# Allegro board ir_board-mp-0902am1030.brd
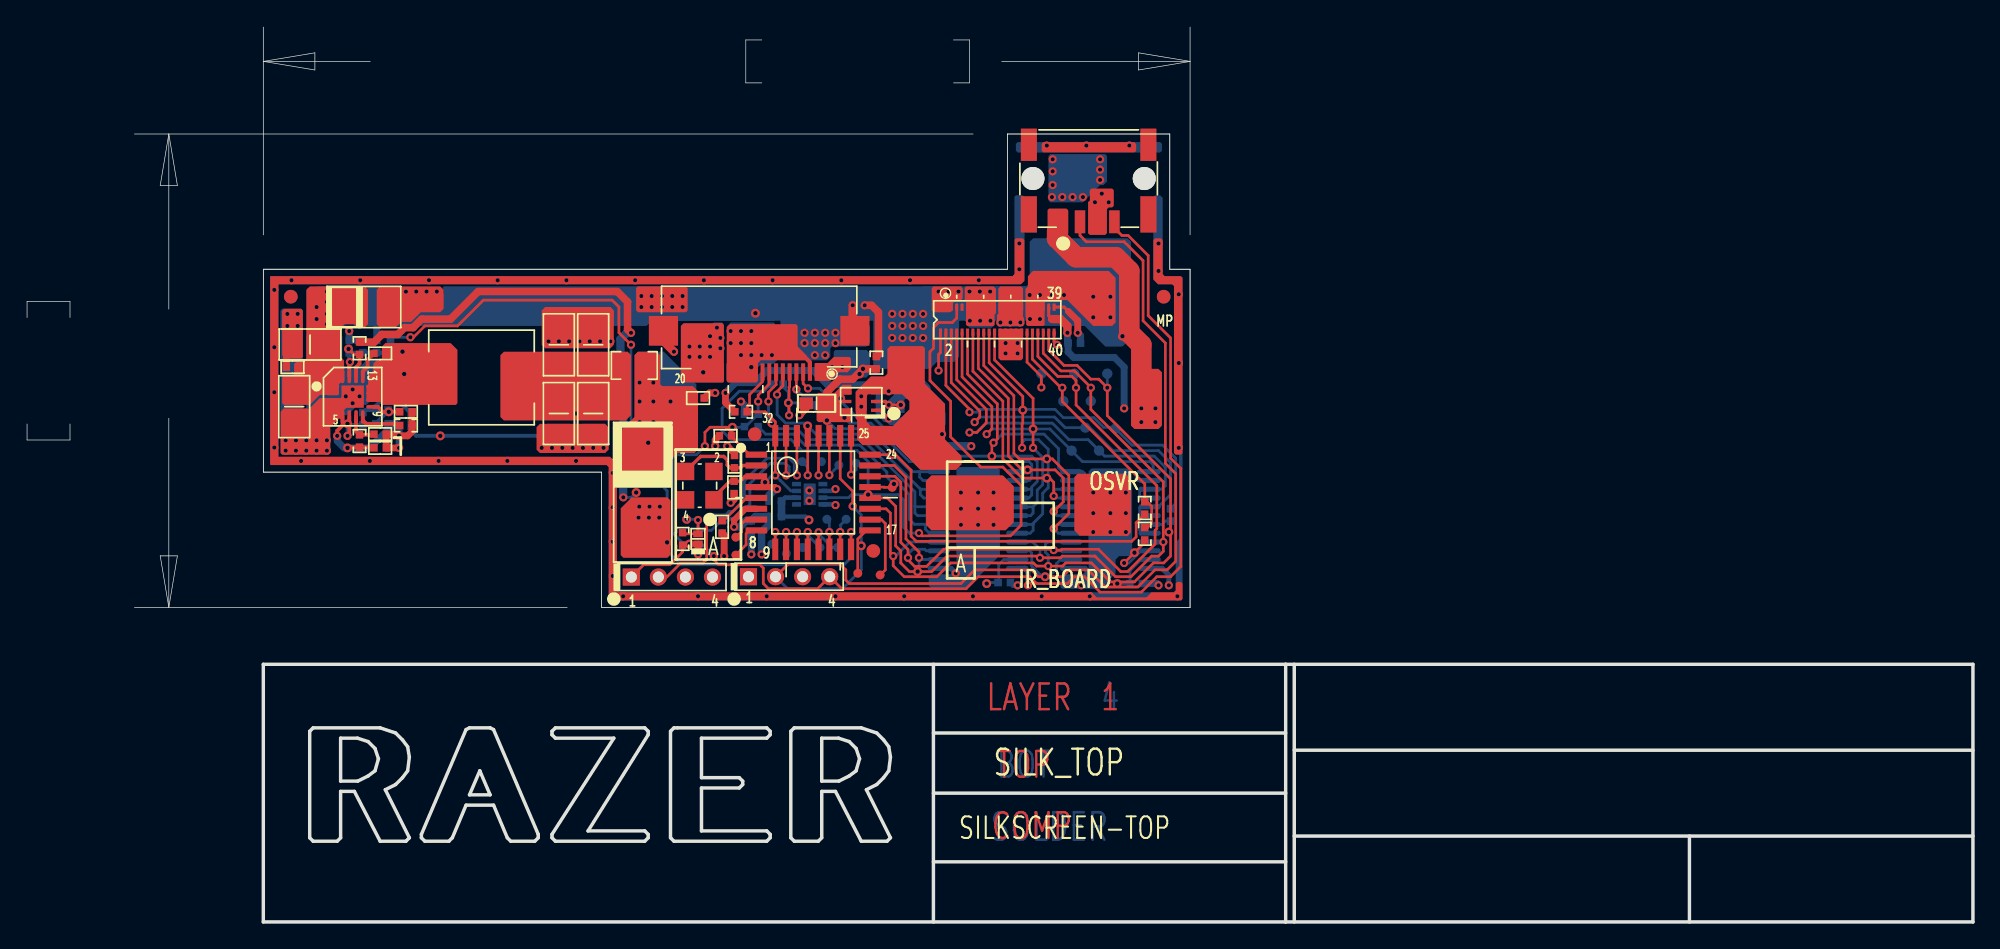
[diagram p0: board, top side]
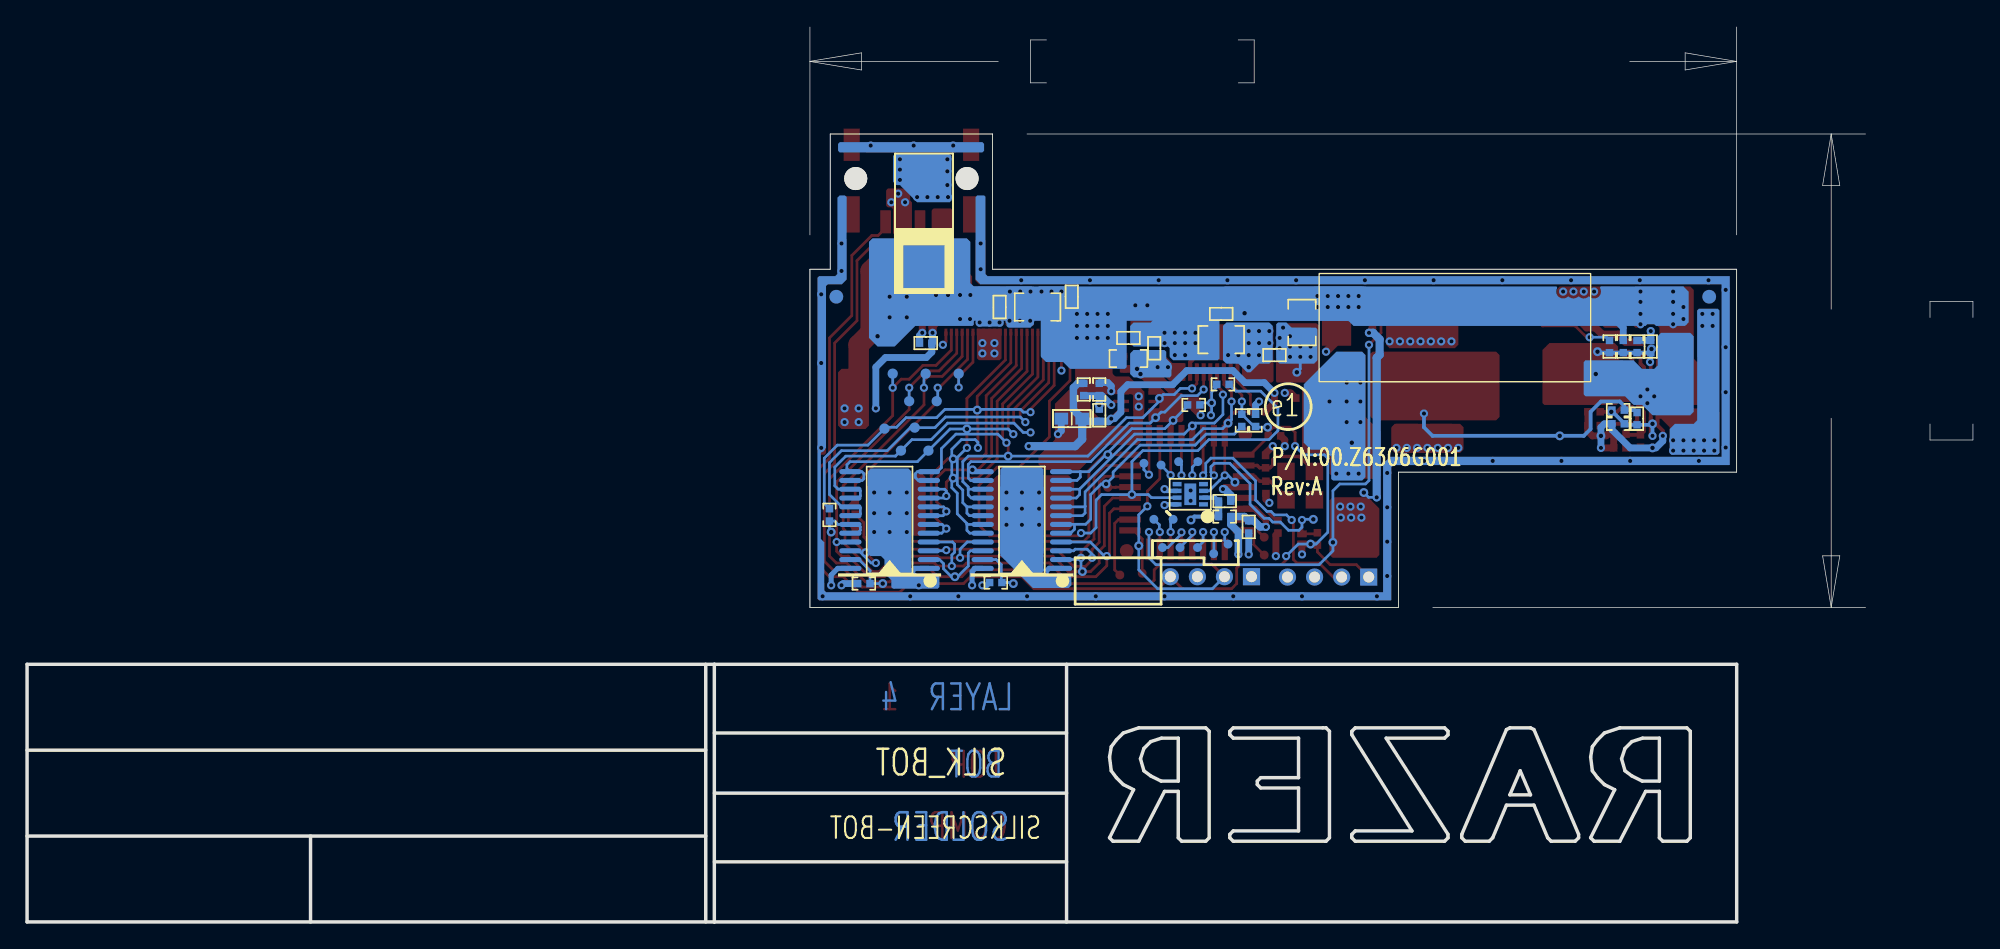
[diagram p1: board, bottom side, seen from below]

Outline 143.83 x 66.17 mm; copper layers: TOP, GND, VCC, BOTTOM. Coordinates in mm from the lower left corner of the outline.
Outline path: 17.46,48.26 17.46,33.26 ; 17.46,48.26 72.46,48.26 ; 17.46,48.26 17.46,33.26 ; 17.46,48.26 72.46,48.26 ; 17.46,33.26 42.46,33.26 ; 17.46,33.26 42.46,33.26 ; 72.46,48.26 72.46,58.26 ; 72.46,48.26 72.46,58.26 ; 42.46,33.26 42.46,23.26 ; 42.46,33.26 42.46,23.26 ; 42.46,23.26 85.96,23.26 ; 42.46,23.26 85.96,23.26 ; 85.96,23.26 85.96,48.26 ; 85.96,23.26 85.96,48.26 ; 72.46,58.26 84.46,58.26 ; 72.46,58.26 84.46,58.26 ; 84.46,58.26 84.46,48.26 ; 84.46,58.26 84.46,48.26 ; 84.46,48.26 85.96,48.26 ; 84.46,48.26 85.96,48.26

## Placement (name value [footprint] x y rotation side)
C1  0.1uF  [C0402]  51.63 41.91 0 bottom
C2  6TPE220MAZB  [TANB]  25.08 45.47 0 top
C3  0.1uF  [C0402]  55.56 44.96 0 bottom
C4  0.1uF  [C0402]  66.61 46.23 90 bottom
C5  0.1uF  [C0402]  71.95 45.47 270 bottom
C6  4TPE470ML  [TAND]  77.53 51.82 90 bottom
C7  0.1uF  [C0402]  62.42 43.18 180 bottom
C8  0.1uF  [C0402]  60.52 42.42 90 bottom
C9  0.1uF  [C0402]  77.41 42.8 0 bottom
C10  NC_47uF  [C1206]  19.75 38.1 270 top
C11  47uF  [C1206]  20.92 42.7 180 top
C12  0.1uF  [C0402]  19.62 41.02 180 top
C13  390pF  [C0402]  24.83 37.21 270 bottom
C14  0.1uF/25V  [C0402]  26.1 42.04 180 top
C15  47uF  [C1206]  39.31 42.67 90 top
C16  47uF  [C1206]  41.85 42.67 90 top
C17  0.1uF  [C0402]  49.59 38.73 0 top
C18  0.1uF  [C0402]  23.81 42.55 270 bottom
C19  15nF  [C0402]  28 37.72 0 top
C20  2.7nF  [C0402]  26.1 35.05 0 top
C21  47uF  [C1206]  39.31 37.59 270 top
C22  47uF  [C1206]  41.85 37.59 270 top
C23  56pF  [C0402]  26.1 36.07 0 top
C24  0.1uF  [C0402]  64.58 37.46 90 bottom
C25  10uF  [C0603]  66.61 37.21 0 bottom
C26  10uF  [C0603]  58.36 38.35 180 top
C27  0.1uF  [C0402]  53.53 29.21 270 bottom
C28  NC_33pF  [C0402]  52.29 34.04 90 top
C29  4.7uF  [C0402]  51.37 29.21 270 top
C30  NC_33pF_NC  [C0402]  52.26 32.13 270 top
C31  0.1uF  [C0402]  51.63 35.94 0 top
C32  4.7uF  [C0402]  55.31 31.11 180 bottom
C33  4TPE470ML  [TAND]  45.5 31.6 270 top
D1  CDBQR0230L  [COMCHIP_CDBQR0230L-HF]  49.59 28.32 90 top
FFC  FFC  [TPC30T]  21.03 49.92 0 top
L1  2.2 uH  [VISHAY_IHLP-2525CZ-01]  33.59 40.26 180 top
NOREF  -  []  72.46 58.26 0 top
NOREF#2  -  []  17.46 48.26 0 top
NOREF#3  -  [unnamed#2]  84.01 46.23 0 top
NOREF#4  -  []  87.46 48.26 90 top
NOREF#5  -  []  17.46 0 0 top
NOREF#6  -  []  42.46 23.26 90 top
NOREF#7  -  []  84.46 48.26 0 top
NOREF#8  -  [unnamed#2]  19.49 46.23 0 top
NOREF#9  -  [unnamed#2]  19.49 46.23 180 bottom
NOREF#10  -  [unnamed#2]  84.01 46.23 180 bottom
P1  ACES_50502-20_20PIN_FPC  [ACES_50502-20]  54.11 40.66 180 top
P2  JAE-WP7B-P040VA1  [JAE_WP7B-PXXXVA1]  71.71 44.53 0 top
P3  NO install  [JP4-2MM]  56.32 25.53 0 top
P4  NO install  [JP4-2MM]  47.66 25.5 0 top
P5  -  [ERNI_214012]  78.46 54.97 180 top
PCB  PCB  [TPC30T]  23.14 49.92 0 top
R1  0  [R0805]  49.59 44.31 270 bottom
R2  0  [R0805]  55.55 43.05 180 bottom
R3  0  [R0805]  69.15 45.47 0 bottom
R4  0  [R0603]  62.42 41.66 180 bottom
R5  36.5K  [R0402]  26.23 37.85 180 bottom
R6  10K_NC  [R0402]  25.84 42.55 270 bottom
R7  10K  [R0402]  26.86 42.55 270 bottom
R8  0  [R0805]  44.89 41.15 0 top
R9  10K  [R0402]  24.83 42.55 270 bottom
R10  78.7K  [R0402]  28 36.7 0 top
R11  10K  [R0402]  26.23 36.83 180 bottom
R12  10K  [R0402]  24.57 42.42 270 top
R13  20.5K  [R0402]  24.57 35.56 270 top
R14  0  [R0402]  62.78 41.35 270 top
R16  52.3K  [R0402]  65.72 39.37 270 bottom
R17  30.1K  [R0402]  64.58 39.37 270 bottom
R19  0  [R0402]  84.52 30.1 90 bottom
R20  0  [R0402]  82.61 28.7 270 top
R21  330  [R0402]  72.22 25.1 180 bottom
R22  330  [R0402]  81.98 25.02 180 bottom
R23  NI  [R0402]  82.61 30.61 270 top
R24  4.99K  [R0402]  52.77 37.72 0 top
R25  120  [R0402]  48.45 28.32 90 top
R26  75  [R0402]  55.31 29.97 180 bottom
R27  0_NC  [R0402]  54.04 37.08 270 bottom
R28  0  [R0402]  53.02 37.08 90 bottom
R29  0_NC  [R0402]  57.59 38.23 0 bottom
R30  0  [R0402]  55.44 39.75 180 bottom
TP1  TP_1mm  [TPC30T#2]  79.84 40.54 180 bottom
TP2  TP_1mm  [TPC30T#2]  78.63 38.51 180 bottom
TP3  TP_1mm  [TPC30T#2]  77.41 40.54 180 bottom
TP4  TP_1mm  [TPC30T#2]  76.59 38.51 180 bottom
TP5  TP_1mm  [TPC30T#2]  74.97 40.54 180 bottom
TP6  TP_1mm  [TPC30T#2]  80.45 36.47 180 bottom
TP7  TP_1mm  [TPC30T#2]  78.22 36.55 180 bottom
TP8  TP_1mm  [TPC30T#2]  79.24 34.85 180 bottom
TP9  TP_1mm  [TPC30T#2]  77.2 34.85 180 bottom
TP10  TP_1mm  [TPC26T]  63.06 25.65 0 top
TP11  TP_1mm  [TPC26T]  63.94 32.13 0 top
TP12  TP_1mm  [TPC26T]  60.54 29.77 180 bottom
TP13  TP_1mm  [TPC26T]  59.12 29.77 180 bottom
TP14  TP_1mm  [TPC26T]  59.91 27.69 180 bottom
TP15  TP_1mm  [TPC26T]  58.61 27.69 180 bottom
TP16  TP_1mm  [TPC26T]  57.32 27.69 180 bottom
TP17  TP_1mm  [TPC26T]  56.12 27.23 180 bottom
TP18  TP_1mm  [TPC26T]  55.05 27.94 180 bottom
TP19  TP_1mm  [TPC26T]  52.39 27.13 0 top
TP20  TP_1mm  [TPC26T]  52.39 28.45 0 top
TP21  TP_1mm  [TPC26T]  61.4 25.78 0 top
TP22  TP_1mm  [TPC26T]  61.28 33.91 180 bottom
TP23  TP_1mm  [TPC26T]  60.01 33.78 180 bottom
TP24  TP_1mm  [TPC26T]  58.71 34.04 180 bottom
TP25  TP_1mm  [TPC26T]  57.29 34.04 180 bottom
U1  TPS54478RTET  [S-PWQFN-N16]  24.07 38.84 270 top
U2  TPS7A3701DRVT  [S-PWSON-N6]  61.66 38.48 90 top
U4  STP16CPC26XTR  [TSSOP24-G]  70.29 29.72 90 bottom
U5  STP16CPC26XTR  [TSSOP24-G]  80.07 29.72 90 bottom
U6  STM8S003K3T6CTR  [LQFP32-0_8MM]  58.1 31.75 270 top
U7  VSOP58438  [VSOP8-G]  57.85 31.62 90 bottom
Y1  NC_TXC_7V_16MHz  [TXC_7V]  49.72 32.26 90 top

## Library data of the parts
C1 C3-C5 C7-C9 C12 C14 C17 C18 C24 C27 C31 = CAP_6
C2 C6 C33 = C_D_KO CAP 150U M 6_0.3V
C10 C11 C15 C16 C21 C22 C25 C26 = CAP_0
C13 C19 C30 = CAP NP
C20 C23 = CAP_NP
C28 = CAP NP_0
C29 C32 = CAPCC 0402_1
D1 = DIODE ZENER_0
FFC PCB TP1-TP25 = T POINT R
L1 = INDUCTOR
P1 = CON2_3
P2 = CON34_0
P3 P4 = 53261-0371_3
P5 = 53261-0371_4
R1-R14 R16 R17 R19-R30 = R_RP_3
U1 = TPS54218RTER
U2 = TPS7A37_1
U4 U5 = STP16CPC26XTR_4
U6 = STM8S003K3T6CTR_1
U7 = VSOP5843_0
Y1 = CRYSTAL_1

## Footprints (pads in the part's own frame, mm; a bottom-side part is the same pattern mirrored in y, then rotated)
ACES_50502-20
  rect 0.305x1.295 smd: 1(-4.75,0) 2(-4.25,0) 3(-3.75,0) 4(-3.25,0) 5(-2.75,0) 6(-2.25,0) 7(-1.75,0) 8(-1.25,0) 9(-0.75,0) 10(-0.25,0) 11(0.25,0) 12(0.75,0) 13(1.25,0) 14(1.75,0) 15(2.25,0) 16(2.75,0) 17(3.25,0) 18(3.75,0) 19(4.25,0) 20(4.75,0)
  rect 2.159x2.21 smd: S1(-7.075,-3.05) S2(7.075,-3.05)
C0402
  rect 0.559x0.559 smd: 1(-0.457,0) 2(0.457,0)
C0603
  rect 1.016x0.889 smd: 1(-0.775,0) 2(0.775,0)
C1206
  rect 1.27x1.651 smd: 1(-1.397,0) 2(1.397,0)
COMCHIP_CDBQR0230L-HF
  rect 0.508x0.711 smd: A(0.375,0) C(-0.375,0)
ERNI_214012
  round 1.702 hole 1.702 unplated: (-4.115,0) (4.115,0)
  rect 0.787x1.702 smd: 1(1.905,3.2) 2(0.635,3.2) 3(-0.635,3.2) 4(-1.905,3.2)
  rect 1.194x2.692 smd: S1(-4.415,2.65) S2(4.415,2.65)
  rect 1.194x2.388 smd: S3(-4.415,-2.5) S4(4.415,-2.5)
JAE_WP7B-PXXXVA1
  rect 0.229x0.533 smd: 1(-3.8,0.925) 2(-3.8,-0.925) 3(-3.4,0.925) 4(-3.4,-0.925) 5(-3,0.925) 6(-3,-0.925) 7(-2.6,0.925) 8(-2.6,-0.925) 9(-2.2,0.925) 10(-2.2,-0.925) 11(-1.8,0.925) 12(-1.8,-0.925) 13(-1.4,0.925) 14(-1.4,-0.925) 15(-1,0.925) 16(-1,-0.925) 17(-0.6,0.925) 18(-0.6,-0.925) 19(-0.2,0.925) 20(-0.2,-0.925) 21(0.2,0.925) 22(0.2,-0.925) 23(0.6,0.925) 24(0.6,-0.925) 25(1,0.925) 26(1,-0.925) 27(1.4,0.925) 28(1.4,-0.925) 29(1.8,0.925) 30(1.8,-0.925) 31(2.2,0.925) 32(2.2,-0.925) 33(2.6,0.925) 34(2.6,-0.925) 35(3,0.925) 36(3,-0.925) 37(3.4,0.925) 38(3.4,-0.925) 39(3.8,0.925) 40(3.8,-0.925) S1(-4.2,0.925) S2(-4.2,-0.925) S3(4.2,0.925) S4(4.2,-0.925)
JP4-2MM
  rect 1.27x1.27 hole 0.813: 1(-3,0)
  round 1.27 hole 0.813: 2(-1,0) 3(1,0) 4(3,0)
LQFP32-0_8MM
  rect 0.457x1.6 smd: 1(-2.8,-4.2) 2(-2,-4.2) 3(-1.2,-4.2) 4(-0.4,-4.2) 5(0.4,-4.2) 6(1.2,-4.2) 7(2,-4.2) 8(2.8,-4.2) 17(2.8,4.2) 18(2,4.2) 19(1.2,4.2) 20(0.4,4.2) 21(-0.4,4.2) 22(-1.2,4.2) 23(-2,4.2) 24(-2.8,4.2)
  rect 1.6x0.457 smd: 9(4.2,-2.8) 10(4.2,-2) 11(4.2,-1.2) 12(4.2,-0.4) 13(4.2,0.4) 14(4.2,1.2) 15(4.2,2) 16(4.2,2.8) 25(-4.2,2.8) 26(-4.2,2) 27(-4.2,1.2) 28(-4.2,0.4) 29(-4.2,-0.4) 30(-4.2,-1.2) 31(-4.2,-2) 32(-4.2,-2.8)
  round 1.016 smd: S1(4.318,4.445) S2(-4.318,-4.318)
R0402
  rect 0.559x0.559 smd: 1(-0.457,0) 2(0.457,0)
R0603
  rect 1.016x0.889 smd: 1(-0.775,0) 2(0.775,0)
R0805
  rect 1.143x1.397 smd: 1(-0.953,0) 2(0.953,0)
S-PWQFN-N16
  oval 0.279x1.016 smd: 1(-0.75,-1.5) 2(-0.25,-1.5) 3(0.25,-1.5) 4(0.75,-1.5) 9(0.75,1.5) 10(0.25,1.5) 11(-0.25,1.5) 12(-0.75,1.5)
  oval 1.016x0.279 smd: 5(1.5,-0.75) 6(1.5,-0.25) 7(1.5,0.25) 8(1.5,0.75) 13(-1.5,0.75) 14(-1.5,0.25) 15(-1.5,-0.25) 16(-1.5,-0.75)
  rect 1.651x1.651 smd: 17(0,0)
S-PWSON-N6
  rect 0.254x0.66 smd: 1(-0.65,-1.05) 2(0,-1.05) 3(0.65,-1.05) 4(0.65,1.05) 5(0,1.05) 6(-0.65,1.05)
  rect 1.397x0.813 smd: 7(0,0)
TANB
  rect 1.27x2.54 smd: 1(-1.651,0) 2(1.651,0)
TAND
  rect 2.337x2.667 smd: 1(-3.391,0) 2(3.391,0)
TPC26T
  round 0.66 smd: 1(0,0)
TPC30T
  round 0 smd: 1(0,0)
TPC30T#2
  round 0.762 smd: 1(0,0)
TSSOP24-G
  oval 0.381x1.651 smd: 1(-3.575,-2.9) 2(-2.925,-2.9) 3(-2.275,-2.9) 4(-1.625,-2.9) 5(-0.975,-2.9) 6(-0.325,-2.9) 7(0.325,-2.9) 8(0.975,-2.9) 9(1.625,-2.9) 10(2.275,-2.9) 11(2.925,-2.9) 12(3.575,-2.9) 13(3.575,2.9) 14(2.925,2.9) 15(2.275,2.9) 16(1.625,2.9) 17(0.975,2.9) 18(0.325,2.9) 19(-0.325,2.9) 20(-0.975,2.9) 21(-1.625,2.9) 22(-2.275,2.9) 23(-2.925,2.9) 24(-3.575,2.9)
  rect 4.978x3.2 smd: 25(0,0)
TXC_7V
  rect 1.295x1.295 smd: 1(-1.05,-1.05) 2(1.05,-1.05) 3(1.05,1.05) 4(-1.05,1.05)
unnamed#2
  round 1.016 smd: 1(0,0)
VISHAY_IHLP-2525CZ-01
  rect 2.489x3.505 smd: 1(-3.1,0) 2(3.1,0)
VSOP8-G
  rect 0.33x0.66 smd: 1(-0.75,-0.975) 2(-0.25,-0.975) 3(0.25,-0.975) 4(0.75,-0.975) 5(0.75,0.975) 6(0.25,0.975) 7(-0.25,0.975) 8(-0.75,0.975)
  rect 1.6x0.889 smd: 9(0,0)

## Nets
2V8: C4.1 C7.1 C17.1 C33.1 R3.1(L) R4.1(L) R8.2(R)
2V8_HMD: C8.1 P1.1 P1.2 R4.2(R)
2V8_PG: R12.2(R) U1.14(PWRGD)
2V8IN: C5.1 C6.1 P2.9 P2.11 P2.13 P2.15 P2.17 P2.19 P2.31 P2.33 P2.35 P2.37 R3.2(R)
AGND: C2.2 C3.2 C4.2 C5.2 C6.2 C7.2 C8.2 C9.2 C10.2 C11.2 C12.2 C15.2 C16.2 C17.2 C18.1 C19.2 C20.2 C21.2 C22.2 C23.2 C25.2 C26.2 C27.2 C28.2 C29.2 C30.2 C31.1 C32.2 C33.2 P1.S1 P1.S2 P2.1 P2.3 P2.21 P2.22 P2.23 P2.24 P2.25 P2.26 P2.27 P2.28 P2.29 P2.30 P2.S1 P2.S2 P2.S3 P2.S4 P3.3 P4.3 P5.3 R2.1(L) R9.1(L) R10.2(R) R11.1(L) R17.1(L) R21.1(L) R22.1(L) R28.2(R) U1.3(GND0) U1.4(GND1) U1.5(AGND0) U1.17(POWER_PAD) U2.3(GND) U2.7(EP) U4.1(GND) U4.25(THM_G) U5.1(GND) U5.25(THM_G) U6.4(V SS) U7.6(GND1) U7.8(GND2) U7.9(EP)
GND_IN: C1.2 P1.3 P1.11 P1.12 P1.13 P1.14 P1.15 R2.2(R)
VCC_5V: C2.1 C3.1 C10.1 C11.1 C12.1 R1.1(L) R6.1(L) R14.1(L) U1.1(VIN1) U1.2(VIN2) U1.16(VIN0)
VCC_5VIN: C1.1 P1.16 P1.17 P1.18 P1.19 P1.20 R1.2(R)
3D3: C9.1 C24.1 C25.1 C27.1 D1.C(CATHODE) P2.39 P3.1 P5.1 R12.1(L) R16.1(L) R24.1(L) R26.2(R) U2.1(OUT) U4.24(VDD) U5.24(VDD) U6.6(VDD)
DATA0: U4.2(SDI) U6.23(PC6 (HS)/SPI_MOSI)
DATA1: R23.2(R) U6.24(PC7 (HS)/SPI_MISO)
DD_BST: C14.2 U1.13(BOOT)
DD_COM1: C20.1 R13.2(R)
DD_COMP: C23.1 R13.1(L) U1.7(COMP)
DD_EN: C18.2 R6.2(R) R7.2(R) R9.2(R) U1.15(EN)
DD_OUT: C13.1 C15.1 C16.1 C21.1 C22.1 L1.1 R5.2(R) R8.1(L)
DD_RT: R10.1(L) U1.8(RT/CLK)
DD_SS: C19.1 U1.9(SS)
DD_SW: C14.1 L1.2 U1.10(PH0) U1.11(PH1) U1.12(PH2)
DD_VSNS: C13.2 R5.1(L) R11.2(R) U1.6(VSENSE)
DRVCLK: P2.36 TP3.1(TP) U4.3(CLK) U5.3(CLK) U6.22(PC5 (HS)/SPI_SCK)
EC_OSCIN: C28.1 U6.2(OSCIN/PA1) Y1.3
EC_OSCOUT: C30.1 U6.3(OSCOUT/PA2) Y1.1
EC_VCAP: C29.1 U6.5(VCAP)
IR_LED_IN: P2.5 R30.2(R) U7.7(IN)
LATEN: P2.40 TP1.1(TP) U4.4(LE) U5.4(LE) U6.19(PC2 (HS) /TIM1_CH2)
LDO_FBA: C24.2 R16.2(R) R17.2(R) U2.2(FB)
LDO_INA: C26.1 R14.2(R) U2.4(EN) U2.6(IN)
LED1: R27.2(R) U4.5(OD0) U4.6(OD1)
LED1_IN: P1.9 R27.1(L) R28.1(L)
LED2: P1.8 U4.7(OD2) U4.8(OD3)
LED3: P1.7 U4.9(OD4) U4.10(OD5)
LED4: R29.2(R) U4.11(OD6) U4.12(OD7)
LED5: P1.5 U4.13(OD8) U4.14(OD9)
LED6: P1.4 U4.15(OD10) U4.16(OD11)
LED7: P2.20 U4.17(OD12) U4.18(OD13)
LED8: P2.18 U4.19(OD14) U4.20(OD15)
LED9: P2.16 U5.5(OD0) U5.6(OD1)
LED10: P2.14 U5.7(OD2) U5.8(OD3)
LED11: P2.12 U5.9(OD4) U5.10(OD5)
LED12: P2.10 U5.11(OD6) U5.12(OD7)
LED13: P2.8 TP9.1(TP) U5.13(OD8) U5.14(OD9)
LED14: P2.6 TP8.1(TP) U5.15(OD10) U5.16(OD11)
LED15: P2.4 TP7.1(TP) U5.17(OD12) U5.18(OD13)
LED16: P2.2 R19.2(R) TP6.1(TP)
LED16_1: R19.1(L) U5.19(OD14) U5.20(OD15)
LED_PTD: P1.6 R29.1(L) R30.1(L)
LED_PWR_EN: R7.1(L) U6.16(TIM1_CH1N/AIN0/(HS) PB0)
OUTEN: P2.38 TP2.1(TP) U4.21(O\E\) U5.21(O\E\) U6.20(PC3 (HS) /TIM1_CH3)
REXTA: R21.2(R) U4.23(R-EXT)
REXTB: R22.2(R) U5.23(R-EXT)
SDI: P2.34 R20.1(L) R23.1(L) TP4.1(TP)
SDO1: U4.22(SDO) U5.2(SDI)
SDO2: R20.2(R) U5.22(SDO)
SDO_BACK: P2.32 TP5.1(TP)
SWIM_DATA: P3.2 P5.2 U6.26(PD1 (HS)/SWIM)
UART_RX: D1.A(ANODE) R25.2(R) U6.31(PD6 (HS)/UART1_RX)
UART_RX1: P4.1 R25.1(L)
UART_TX: P4.2 U6.30(PD5 (HS)/UART1_TX)
UPU_RES: C31.2 P3.4 P5.4 U6.1(NRST)
VERTICAL_SYNC: P1.10 R24.2(R) U6.32(PD7 (HS)/TLI [ TIM1_CH4]) U7.3(OUT)
VS: C32.1 R26.1(L) U7.2(VS)
N16006904: TP10.1(TP) U6.18(PC1 (HS) /TIM1_CH1/UART1_CK)
N16006928: TP11.1(TP) U6.21(PC4 (HS) /TIM1_CH4/CLK_CCO)
N16007072: TP12.1(TP) U6.15(TIM1_CH2N/ AIN1/(HS) PB1)
N16007076: TP13.1(TP) U6.14(TIM1_CH3N/ AIN2/ (HS) PB2)
N16007080: TP14.1(TP) U6.13(TIM1_ETR/AIN3/(HS) PB3)
N16007084: TP15.1(TP) U6.12(I2C_SCL/(T) PB4)
N16007088: TP16.1(TP) U6.11(I2C_SDA/ (T) PB5)
N16007096: TP17.1(TP) U6.10(PB6)
N16007100: TP18.1(TP) U6.9(PB7)
N16007406: TP21.1(TP) U6.17(PE5 (HS) /SPI_NSS)
N16007454: TP19.1(TP) U6.8(PF4)
N16007512: TP20.1(TP) U6.7([SPI_NSS] TIM2_CH3/(HS)PA3)
N16007570: TP22.1(TP) U6.25(PD0 (HS)/ TIM1_BKIN [CLK_CCO)
N16007642: TP23.1(TP) U6.27(PD2 (HS) [TIM2_CH3])
N16007646: TP24.1(TP) U6.28(PD3 (HS)/TIM2_CH2/ADC_ETR)
N16007650: TP25.1(TP) U6.29(PD4 (HS)/BEEP/TIM2_CH1)

Pads without a net: FFC 1; NOREF#3 1; NOREF#8 1; NOREF#9 1; NOREF#10 1; P2 7; P4 4; P5 S1 S2 S3 S4; PCB 1; U2 5; U6 S1 S2; U7 1 4 5; Y1 2 4

## Via types
v1: diameter 0.61, hole 0.305, TOP to BOTTOM, 318 vias
v2: diameter 0.66, hole 0.33, TOP to BOTTOM, 45 vias

## Routing (per net, layer and track width the routed paths; a pad name or vN(x,y) marks a point on that pad's centre or on a via; arc(x,y) is an arc through that point)
2V8:
  vias: v1(45.28,39.88) v1(45.28,38.48) v1(45.28,36.96) v1(45.4,33.15) v1(46.16,33.15) v1(46.29,39.88) v1(46.29,38.48) v1(46.29,36.96) v1(47.05,33.15) v1(47.56,38.48) v1(63.94,44.96) v1(63.94,44.07) v1(63.94,43.18) v1(64.71,44.96) v1(64.71,44.07) v1(64.71,43.18) v1(65.47,44.96) v1(65.47,44.07) v1(65.47,43.18) v1(66.23,44.96) v1(66.23,44.07) v1(66.23,43.18) v2(45.91,35.43)
2V8_HMD:
  vias: v1(59.5,41.02) v1(60.26,41.02) v2(61.53,40.51)
2V8_PG: length 2.7
  TOP w0.203: v2(23.76,42.37) 24.17,41.96 R12.2
  TOP w0.279: U1.14 24.32,41.02 24.57,41.27 R12.2
2V8IN:
  vias: v1(69.66,46.61) v1(69.68,44.45) v1(70.42,46.61) v1(70.45,44.45) v1(71.18,46.61) v1(71.21,44.45) v1(74.1,46.35) v1(74.13,44.58) v1(74.87,46.35) v1(74.87,44.58) v1(75.76,46.35) v1(76.64,46.35) v1(78.8,46.23) v1(78.8,44.7) v1(80.07,46.23) v1(80.07,44.7) v2(80.96,43.31)
AGND: length 51
  TOP w0.203: v1(67.37,40.77) 67.37,41.96 67.51,42.1 P2.S2
  TOP w0.229: v1(76.14,42.67) 75.91,42.9 P2.S4 ; 76.96,45.15 76.66,45.46 P2.S3
  TOP w0.279: U1.5 23.32,36.71 22.92,36.32 v1(22.92,35.94)
  TOP w0.457: v1(55.44,32) 55.29,32.15 U6.4
  TOP w0.508: C12.2 19.16,42.34 C11.2 ; v1(52.01,30.99) 52.26,31.24 C30.2 ; C29.2 51.52,28.6 v1(51.52,27.05) ; C26.2 57.58,37.96 v1(57.09,37.46) ; v1(50.86,39.12) 50.43,39.12 C17.2 ; C19.2 R10.2 28.46,36.27 28.13,35.94 27.11,35.94 26.99,36.07 C23.2 C20.2 v1(27.5,35.05) ; v1(51.75,35.18) 52.29,34.65 C28.2 ; C31.1 50.86,35.64 v1(50.86,35.18) ; v1(77.66,43.56) 77.66,44.45 76.96,45.15
  TOP w0.61: v1(47.82,42.16) 47.04,42.94 P1.S2 ; v1(61.02,45.59) 61.02,43.87 P1.S1
  BOTTOM w0.33: U7.8 59.7,30.87 v1(59.75,30.82) ; v1(59.75,32) 59.62,31.87 U7.6
  BOTTOM w0.381: R21.1 72.89,24.89 v1(73.22,24.89) ; 78.42,25.91 78.19,26.14 U5.1 ; U4.1 68.28,26.14 v1(68.64,25.78)
  BOTTOM w0.508: R22.1 83.5,25.02 v1(83.63,24.89) ; C25.2 67.39,36.31 v1(67.63,36.07) ; v1(53.53,27.18) C27.2 ; v1(23.81,43.69) C18.1 R9.1 ; v1(27.5,35.05) v2(27.5,35.94) 27.5,36.58 27.24,36.83 R11.1 26.68,36.4 25.34,35.05 23.43,35.05 22.92,35.56 v1(22.92,35.94) ; v1(63.69,39.24) 63.69,39.62 63.94,39.88 64.53,39.88 R17.1 ; C9.2 77.86,43.36 v1(77.66,43.56) ; v1(52.77,38.48) 53.02,38.23 R28.2
  BOTTOM w0.559: v1(55.44,32) 55.31,32 54.85,31.55 C32.2
  vias: v1(18.28,46.74) v1(18.28,42.49) v1(18.28,39.17) v1(18.28,35.08) v1(19.11,35.61) v1(19.11,34.85) v1(19.24,44.96) v1(19.24,44.07) v1(19.55,47.45) v1(19.88,35.61) v1(19.88,34.85) v1(20,44.96) v1(20,44.07) v1(20.26,34.09) v1(20.64,35.61) v1(20.64,34.85) v1(21.4,35.61) v1(21.4,34.85) v1(22.16,35.61) v1(22.16,34.85) v1(23.56,38.86) v1(24.07,39.37) v1(24.07,38.35) v1(24.57,38.86) v1(24.63,47.45) v1(25.34,34.09) v1(28,46.61) v1(28.77,46.61) v1(29.53,46.61) v1(29.71,47.45) v1(30.29,46.61) v1(30.42,34.09) v1(34.79,47.45) v1(35.5,34.09) v1(38.04,35.05) v1(38.54,42.93) v1(38.8,35.05) v1(39.31,42.93) v1(39.56,35.05) v1(39.87,47.45) v1(40.07,42.93) v1(40.32,35.05) v1(40.58,34.09) v1(40.83,42.93) v1(41.08,35.05) v1(41.59,42.93) v1(41.85,35.05) v1(42.35,42.93) v1(42.61,35.05) v1(43.12,42.93) v1(43.29,33.2) v1(43.29,30.66) v1(43.29,28.12) v1(43.29,25.58) v1(44.06,24.08) v1(44.95,47.45) v1(45.2,29.9) v1(45.25,30.71) v1(46.01,30.71) v1(45.96,29.9) v1(46.77,30.71) v1(46.72,29.9) v1(49.59,24.08) v1(50.03,47.45) v1(54.67,24.08) v1(55.11,47.45) v1(57.47,43.56) v1(57.47,42.8) v1(57.82,31.9) v1(57.82,31.14) v1(58.23,43.56) v1(58.23,42.8) v1(58.23,41.91) v1(58.99,43.56) v1(58.99,42.8) v1(58.99,41.91) v1(59.75,43.56) v1(59.75,42.8) v1(59.75,24.08) v1(60.19,47.45) v1(61.66,38.86) v1(61.66,38.1) v1(64.83,24.08) v1(65.27,47.45) v1(67.37,46.61) v1(68.11,46.61) v1(68.85,46.61) v1(69.02,31.75) v1(69.02,30.56) v1(69.02,29.36) v1(69.91,24.08) v1(70.29,31.75) v1(70.29,30.56) v1(70.29,29.36) v1(70.35,47.45) v1(71.44,31.75) v1(71.44,30.56) v1(71.44,29.36) v1(71.95,44.32) v1(72.33,42.8) v1(72.33,42.04) v1(72.68,44.32) v1(73.22,42.8) v1(73.22,42.04) v1(73.34,50.16) v1(73.34,48.26) v1(73.42,44.32) v1(74.99,24.08) v1(75.37,57.4) v1(75.81,56.39) v1(75.81,55.5) v1(75.81,54.48) v1(75.76,53.59) v1(76.52,53.59) v1(77.28,53.59) v1(77.91,24.89) v1(78.04,53.59) v1(78.3,57.4) v1(78.55,24.08) v1(78.8,31.75) v1(78.8,30.23) v1(78.8,28.83) v1(78.93,53.21) v1(79.31,56.39) v1(79.31,55.63) v1(79.31,54.86) v1(79.44,53.85) v1(79.95,53.21) v1(80.07,31.75) v1(80.07,30.23) v1(80.07,28.83) v1(81.22,31.75) v1(81.22,30.23) v1(81.22,28.83) v1(81.47,57.4) v1(83.63,50.16) v1(83.63,48.13) v1(85.03,24.08) v1(85.13,46.41) v1(85.13,41.33) v1(85.13,35.05)
GND_IN: length 3.8
  TOP w0.305: P1.3 57.86,41.39 56.71,42.55 55.31,42.55
  vias: v1(52.01,43.69) v1(52.01,42.8) v1(52.77,43.69) v1(52.77,42.8) v1(52.77,41.91) v1(53.53,43.69) v1(53.53,42.8) v1(53.53,41.91) v1(54.29,41.91) v1(55.05,41.91) v2(53.53,41.02)
VCC_5V: length 6.2
  TOP w0.559: R14.1 62.93,41.96 62.93,45.09 62.42,45.59 v1(61.91,45.59)
  BOTTOM w0.508: 26.35,44.45 25.84,43.94 R6.1
  vias: v1(21.4,45.47) v1(21.4,44.58) v1(22.16,46.61) v1(22.16,45.85) v1(22.16,44.96) v1(22.16,44.2) v1(24.57,46.61) v1(24.57,45.85) v1(24.57,44.96) v1(24.57,44.2) v1(45.4,46.28) v1(45.4,45.47) v1(46.16,46.28) v1(46.16,45.47) v1(46.93,46.28) v1(46.93,45.47) v1(47.69,46.28) v1(47.69,45.47) v1(48.45,46.28) v1(48.45,45.47) v2(53.84,45.01)
VCC_5VIN: length 1.2
  BOTTOM w0.203: v1(49.72,41.78) 49.72,40.89 v2(49.97,40.64)
  vias: v1(48.96,42.55) v1(48.96,41.78) v1(49.72,42.55) v1(50.48,43.31) v1(50.48,42.55) v1(50.48,41.78) v1(50.99,43.94) v1(51.24,43.18) v1(51.24,42.42)
3D3: length 108.2
  TOP w0.229: P2.39 75.51,44.82 75.76,44.58
  TOP w0.254: U2.1 63.07,37.83 v1(63.69,37.21)
  TOP w0.457: U6.6 53.09,30.55 52.26,29.72 v1(52.26,29.21)
  TOP w0.508: R24.1 51.63,38.4 v1(51.63,39.12) ; D1.C v1(49.59,27.18)
  TOP w0.559: R12.1 25.67,42.88 26.23,43.43 26.23,43.44 27.4,43.44 27.9,43.94 28.54,43.94 29.17,44.58 31.31,44.58 33.34,46.61 43.62,46.61 44.39,45.85 44.39,43.82 v1(44.64,43.56)
  TOP w0.61: 75.76,44.58 76.39,44.58 76.9,44.07 v1(76.9,43.56)
  TOP w1.524: 76.14,51.05 76.14,50.55 77.53,49.15 80.45,49.15 81.47,48.13 81.47,43.56 82.36,42.67 82.36,40.51 82.74,40.13
  BOTTOM w0.203: v2(45.02,31.75) 44.67,31.39 v1(44.07,31.39)
  BOTTOM w0.381: v1(73.98,24.89) 73.98,25.91 73.74,26.14 U4.24 ; v1(84.39,24.89) 84.39,25.65 83.9,26.14 U5.24
  BOTTOM w0.508: v1(63.69,37.21) 63.46,37.21 62.98,37.69 62.98,39.22 62.47,39.73 59.14,39.73 58.1,40.77 54.7,40.77 53.81,39.88 52.39,39.88 v1(51.63,39.12) ; v1(76.9,43.56) 76.9,42.85 C9.1 76.95,42.14 77.36,41.73 80.38,41.73 81.09,41.02 v1(81.09,37.97)
  BOTTOM w0.559: R16.1 66.15,39.83 66.48,39.5 66.48,37.86 C25.1 65.63,37.01 C24.1 63.89,37.01 v1(63.69,37.21) ; v1(52.26,29.21) 52.69,29.21 53.15,29.67 C27.1 53.84,29.97 R26.2 54.85,29.39 54.29,28.83 v1(54.29,27.18)
  BOTTOM w0.61: v1(44.64,43.56) 44.34,43.56 43.85,43.08 43.85,41.93 44.07,41.72 v1(44.07,31.39) ; v1(69.79,35.18) 66.36,35.18 65.84,35.7 C25.1
  vias: v1(82.36,37.97) v1(82.36,36.96) v1(83.4,37.97) v1(83.4,36.96)
DATA0: length 12
  TOP w0.203: v1(65.93,26.92) 65.93,27.36 64.96,28.32 64.96,32.89 64.1,33.75 U6.23
  BOTTOM w0.203: v2(65.82,25.91) 65.93,26.01 v1(65.93,26.92) 66,26.8 67.39,26.8 U4.2
DATA1: length 27.3
  TOP w0.203: U6.24 v2(63.94,34.55) 64.19,34.55 65.34,33.4 65.34,28.52 65.72,28.14 81.65,28.14 81.98,28.47 81.98,29.51 R23.2
DD_BST: length 2
  TOP w0.279: U1.13 24.82,40.71 25.17,41.06 25.17,41.57 C14.2
DD_COM1: length 2
  TOP w0.279: v2(23.69,35.05) 23.74,35.1 R13.2 25.59,35.1 C20.1
DD_COMP: length 2.5
  TOP w0.279: U1.7 24.32,36.28 R13.1 25.59,36.02 C23.1
DD_EN: length 5.8
  TOP w0.279: v1(23.87,41.4) 23.82,41.35 U1.15
  BOTTOM w0.305: v1(23.87,41.4) 23.81,41.45 C18.2 R9.2 R6.2 R7.2 27.67,42.09 v2(27.75,42.16)
DD_OUT: length 19.3
  BOTTOM w0.279: C13.1 25.01,37.85 R5.2 25.77,38.15 26.1,38.48 27.5,38.48 28.26,37.72 28.26,36.45 28.77,35.94 v2(30.54,35.94) 39.94,35.94 40.58,36.58 v1(40.58,37.59)
DD_RT: length 3.1
  TOP w0.279: R10.1 27.42,36.83 25.08,36.83 24.82,37.1 U1.8
DD_SS: length 2.1
  TOP w0.279: U1.9 25.93,38.09 26.3,37.72 v2(26.73,37.72) C19.1
DD_SW:
  vias: v2(27.88,40.51)
DD_VSNS: length 5.9
  TOP w0.279: U1.6 23.82,36.07 v1(23.69,35.94)
  BOTTOM w0.279: R5.1 26.68,37.77 25.77,36.86 R11.2 25.69,36.75 C13.2 23.76,36.75 v2(23.69,36.83) v1(23.69,35.94)
DRVCLK: length 54.1
  TOP w0.203: P2.36 74.71,41.81 76.19,40.34 77.23,40.34 77.53,40.03 v1(77.53,39.5) 77.53,38.23 83.5,32.26 83.5,29.08 83.38,28.96 83.38,27.94 81.34,25.91 80.84,25.91 79.18,27.56 76.48,27.56 76.42,27.5 v1(75.88,27.5) 75.82,27.56 67.75,27.56 66.48,26.29 65.6,26.29 65.11,26.77 v1(65.11,26.92) 65.11,27.53 64.58,28.07 64.58,32.51 64.14,32.95 U6.22
  BOTTOM w0.203: v1(75.88,27.5) 75.94,27.44 U5.3 ; TP3.1 77.53,40.41 v1(77.53,39.5) ; v1(65.11,26.92) 65.11,27.2 65.47,27.56 66.36,27.56 66.47,27.44 U4.3
EC_OSCIN: length 6.3
  TOP w0.254: U6.2 52.9,33.75 52.72,33.58 C28.1 51.96,33.58 51.75,33.78 51.75,34.16 51.5,34.42 49.78,34.42 Y1.3
EC_OSCOUT: length 4
  TOP w0.254: Y1.1 50.77,31.4 51.96,32.59 C30.1 52.72,32.59 53.08,32.95 U6.3
EC_VCAP: length 3.2
  TOP w0.203: U6.5 53.18,31.35 52.91,31.09 51.48,29.67 C29.1
IR_LED_IN: length 59
  TOP w0.203: P2.5 68.71,44.65 68.39,44.32 67.37,44.32 66.99,43.94 66.99,42.42 66.74,42.16 66.74,40.03 68.26,38.51 68.26,35.86 70.5,33.63 72.12,33.63 73.47,32.28 73.47,29.34 72.68,28.55 66.13,28.55 v1(65.93,28.75)
  BOTTOM w0.203: v2(62.17,31.6) 64.4,31.6 64.81,31.19 64.81,29.16 65.21,28.75 v1(65.93,28.75) ; v2(62.17,31.6) 62.17,34.04 61.35,34.85 57.29,34.85 56.48,35.66 52.03,35.66 51.37,36.32 51.37,37.97 52.64,39.24 54.47,39.24 R30.2 ; v2(62.17,31.6) 60.95,31.6 60.72,31.37 U7.7
LATEN: length 58.1
  TOP w0.203: P2.40 75.51,42.28 76.64,41.15 77.61,41.15 78.63,40.13 79.21,40.13 v1(79.84,39.5) 79.84,37.44 84.52,32.77 84.52,27.05 84.01,26.54 83.25,26.54 81.85,25.15 80.07,25.15 78.68,26.54 76.77,26.54 76.54,26.31 v1(75.48,26.31) 74.61,26.31 74.38,26.54 68.26,26.54 67.25,25.53 64.83,25.53 64.02,26.34 v1(64.02,27.05) 63.82,27.25 63.82,30.23 63.49,30.55 U6.19
  BOTTOM w0.203: v1(64.02,27.05) 64.2,27.05 65.24,28.09 U4.4 ; U5.4 75.43,28.09 75.27,27.94 75.27,27.33 75.48,27.13 v1(75.48,26.31) ; TP1.1 v1(79.84,39.5)
LDO_FBA: length 5.3
  TOP w0.203: v2(64.58,38.23) v1(63.69,38.23)
  TOP w0.254: U2.2 63.44,38.48 v1(63.69,38.23)
  BOTTOM w0.508: R17.2 64.38,38.91 v1(63.69,38.23) ; R17.2 C24.2 ; R17.2 R16.2
LDO_INA: length 5.2
  TOP w0.559: C26.1 59.13,39.18 60.08,40.13 61.02,40.13 v2(61.79,40.89) R14.2
LED1: length 19.1
  BOTTOM w0.203: 66.41,29.4 66.41,29.03 66.7,28.74 U4.5 ; 66.41,29.4 65.58,29.4 65.21,29.77 65.21,31.6 64.43,32.38 v2(64.07,32.38) 63.55,32.91 63.55,33.26 61.56,35.26 57.49,35.26 56.68,36.07 54.6,36.07 R27.2 ; 66.41,29.4 67.39,29.4 U4.6
LED1_IN: length 5.8
  TOP w0.203: P1.9 54.86,39.78 54.04,38.96 v1(54.04,38.48)
  BOTTOM w0.203: v1(54.04,38.48) R27.1 53.12,36.63 R28.1 52.97,36.58 v2(52.13,36.58)
LED2: length 22
  TOP w0.203: v1(54.8,38.48) 54.8,39.17 55.36,39.73 P1.8
  BOTTOM w0.203: 65.62,30.73 65.62,31.8 61.76,35.66 57.7,35.66 56.88,36.47 55.46,36.47 v2(55.05,36.88) 54.8,37.13 v1(54.8,38.48) ; 65.62,30.73 65.62,30.24 65.82,30.04 U4.7 ; 65.62,30.73 65.66,30.69 U4.8
LED3: length 19.4
  TOP w0.203: P1.7 55.86,39.65 55.44,39.22 v1(55.44,38.99)
  BOTTOM w0.203: 66.03,32 61.96,36.07 58.31,36.07 v2(57.7,36.68) 57.49,36.88 56.07,36.88 55.44,37.52 v1(55.44,38.99) ; 66.03,32 66.04,31.99 U4.10 ; 66.03,32 66.03,31.6 66.28,31.34 U4.9
LED4: length 13.4
  BOTTOM w0.203: U4.11 66.23,32.64 65.98,32.89 65.98,33.29 ; U4.12 65.98,33.29 ; 65.98,33.29 65.35,33.29 62.17,36.47 59.73,36.47 v2(59.12,37.08) 58.05,38.15 R29.2
LED5: length 24.2
  TOP w0.203: v1(56.86,39.37) P1.5
  BOTTOM w0.203: v1(56.86,39.37) 57.32,38.91 58.51,38.91 59.73,37.69 60.01,37.69 v2(60.41,37.29) 60.82,36.88 62.37,36.88 65.21,34.04 74.05,34.04 74.26,33.83 74.26,33.27 ; 74.26,33.27 74.24,33.29 U4.13 ; 74.26,33.27 74.26,32.82 74.08,32.64 U4.14
LED6: length 25.5
  TOP w0.203: P1.4 57.36,39.8 v1(57.72,39.45)
  BOTTOM w0.203: 74.26,32 74.26,31.57 74.03,31.34 U4.16 ; 74.26,32 74.25,31.99 U4.15 ; 74.26,32 74.26,32.16 74.66,32.56 74.66,34.04 74.26,34.44 65.42,34.44 62.57,37.29 61.35,37.29 60.13,38.51 v2(60.13,38.71) 59.85,38.99 59.04,38.99 58.59,39.45 v1(57.72,39.45)
LED7: length 17.6
  TOP w0.203: P2.20 71.51,41.56 74.36,38.71 v2(74.36,36.45) v1(74.36,35.05)
  BOTTOM w0.203: U4.17 74.36,30.69 ; 74.36,30.69 74.66,31 74.66,31.93 75.07,32.33 75.07,34.34 v1(74.36,35.05) ; 74.36,30.69 74.36,30.23 74.18,30.04 U4.18
LED8: length 21.2
  TOP w0.203: P2.18 71.11,41.35 73.6,38.86 v2(73.6,37.85) 73.6,36.88 73.55,36.83 v1(73.55,35.05)
  BOTTOM w0.203: 74.36,29.39 U4.19 ; 74.36,29.39 74.36,28.96 74.15,28.74 U4.20 ; 74.36,29.39 74.36,29.46 75.07,30.18 75.07,31.7 75.48,32.11 75.48,34.95 74.76,35.66 73.75,35.66 73.55,35.46 v1(73.55,35.05)
LED9: length 21.9
  TOP w0.203: v1(75.88,29.08) 77,30.2 77,33.02 75.78,34.24 v2(75.37,34.24) 73.34,34.24 72.94,34.65 72.94,38.91 70.71,41.14 P2.16
  BOTTOM w0.203: U5.5 76.22,28.74 v1(75.88,29.08) 76.19,29.39 U5.6
LED10: length 20.6
  TOP w0.203: P2.14 70.31,40.93 72.53,38.71 72.53,34.44 73.55,33.43 v2(73.95,33.43) 75.98,33.43 76.59,32.82 76.59,31.06 v1(75.88,30.35)
  BOTTOM w0.203: U5.8 76.09,30.69 75.88,30.48 v1(75.88,30.35) 75.88,30.28 76.12,30.04 77.17,30.04 U5.7
LED11: length 18.8
  TOP w0.203: v1(75.88,31.5) 75.88,32.51 75.58,32.82 v2(75.37,32.82) 73.55,32.82 72.12,34.24 72.12,38.51 69.91,40.72 P2.12
  BOTTOM w0.203: U5.9 76.04,31.34 v1(75.88,31.5) 75.88,31.87 76.01,31.99 U5.10
LED12: length 20.6
  TOP w0.203: P2.10 69.51,40.51 71.72,38.3 71.72,35.71 v1(71.44,35.43) 71.31,35.31 v2(71.31,34.44)
  BOTTOM w0.203: v1(71.44,35.43) 72.07,36.07 75.17,36.07 76.24,35 76.24,33.59 76.54,33.29 U5.12 78.02,33.29 78.17,33.15 78.17,32.86 77.95,32.64 U5.11
LED13: length 25.3
  TOP w0.203: v1(70.93,36.07) 71.31,36.45 71.31,38.1 69.11,40.3 P2.8
  BOTTOM w0.203: v1(70.93,36.07) 71.31,36.45 75.61,36.45 TP9.1 78.02,34.04 82.99,34.04 83.23,33.8 83.23,33.51 83.01,33.29 U5.13 82.12,33.29 81.98,33.15 81.98,32.77 82.1,32.64 U5.14
LED14: length 29.9
  TOP w0.203: P2.6 68.71,40.09 70.9,37.9 70.9,36.91 70.19,36.2 v1(69.66,36.2)
  BOTTOM w0.203: U5.16 82.39,31.34 82.23,31.5 82.23,31.88 82.35,31.99 U5.15 82.98,32 83.88,32 84.13,32.25 84.13,33.63 83.31,34.44 79.64,34.44 TP8.1 78.42,35.66 77,35.66 75.78,36.88 70.88,36.88 70.19,36.2 v1(69.66,36.2)
LED15: length 30
  TOP w0.203: v1(70.04,36.96) 70.42,37.33 70.42,37.77 68.31,39.88 P2.4
  BOTTOM w0.203: v1(70.04,36.96) 70.42,37.33 75.94,37.33 76.72,36.55 TP7.1 78.55,36.55 80.25,34.85 83.63,34.85 84.52,33.96 84.52,31.6 83.61,30.69 U5.17 82.32,30.69 82.23,30.61 82.23,30.17 82.36,30.04 U5.18
LED16: length 27.3
  TOP w0.203: P2.2 67.91,39.67 69.66,37.92 v1(69.66,37.69)
  BOTTOM w0.203: v1(69.66,37.69) 70.19,37.69 70.4,37.9 75.98,37.9 76.59,37.29 78.85,37.29 79.57,36.58 80.35,36.58 TP6.1 81.67,35.26 83.93,35.26 84.9,34.29 84.9,30.94 R19.2
LED16_1: length 4.4
  BOTTOM w0.203: U5.20 82.45,28.74 82.23,28.96 82.23,29.21 82.42,29.39 U5.19 83.88,29.39 84.13,29.64 R19.1 84.52,28.96 v2(84.39,28.83)
LED_PTD: length 6.6
  TOP w0.203: v1(56.32,37.46) 56.32,39.55 56.36,39.59 P1.6
  BOTTOM w0.203: v2(56.27,38.38) 56.98,38.38 R29.1 ; v2(56.27,38.38) 56.27,37.52 v1(56.32,37.46) ; v2(56.27,38.38) 56.27,39.17 55.89,39.55 R30.1
LED_PWR_EN: length 56.4
  TOP w0.203: v1(60.9,28.83) U6.16 ; v1(28.33,43.23) 28.56,43.23 29.4,44.07 31.81,44.07 33.72,45.97 43.24,45.97 43.75,45.47 43.75,43.56 v1(44.64,42.67)
  BOTTOM w0.203: v1(44.64,42.67) 44.64,32.64 44.89,32.38 46.8,32.38 47.31,31.88 v2(47.31,28.07) 47.31,27.43 48.32,26.42 60.39,26.42 60.9,26.93 v1(60.9,28.83) ; R7.1 27.09,43.23 v1(28.33,43.23)
OUTEN: length 53.1
  TOP w0.203: P2.38 75.11,42.04 76.42,40.74 77.41,40.74 78.63,39.52 v1(78.63,39.5) 78.63,37.9 83.99,32.54 v1(83.99,28.09) 83.99,27.41 83.63,27.05 83.12,27.05 81.6,25.53 80.45,25.53 78.93,27.05 76.52,27.05 76.39,26.92 v1(74.87,26.92) 74.74,27.05 68.01,27.05 66.87,25.91 65.21,25.91 64.58,26.54 64.58,27.43 64.2,27.81 64.2,30.73 63.58,31.35 U6.20
  BOTTOM w0.203: v1(78.63,39.5) TP2.1 ; U4.21 74.33,28.09 74.87,27.56 v1(74.87,26.92) ; v1(83.99,28.09) U5.21
REXTA: length 3.7
  BOTTOM w0.203: v2(70.93,25.02) 71.01,25.1 R21.2 71.82,25.15 71.82,26.42 72.2,26.79 U4.23
REXTB: length 3.7
  BOTTOM w0.203: v2(80.58,25.02) R22.2 81.52,25.98 82.34,26.79 U5.23
SDI: length 19.6
  TOP w0.203: R20.1 82.82,29.16 83.12,29.46 83.12,30.73 82.79,31.06 R23.1 82.61,32.38 76.52,38.48 v1(76.52,39.5) 76.42,39.5 74.31,41.6 P2.34
  BOTTOM w0.203: v1(76.52,39.5) 76.52,38.58 TP4.1
SDO1: length 6.1
  BOTTOM w0.203: U5.2 76.39,26.79 76.09,26.49 76.09,26.11 75.5,25.53 v2(75.25,25.53) 75.04,25.53 74.26,26.31 74.26,27.28 74.09,27.44 U4.22
SDO2: length 4.6
  TOP w0.203: v1(81.09,26.54) v2(81.85,27.3) 82.61,28.07 R20.2
  BOTTOM w0.203: U5.22 82.34,27.44 81.44,26.54 v1(81.09,26.54)
SDO_BACK: length 5.5
  TOP w0.203: P2.32 73.91,41.39 74.97,40.34 v1(74.97,39.52)
  BOTTOM w0.203: TP5.1 v1(74.97,39.52)
SWIM_DATA: length 80.7
  TOP w0.203: v1(61.02,30.73) 61.02,31.85 60.1,32.77 U6.26 ; P5.2 77.83,50.76 78.3,50.29 81.09,50.29 82.49,48.89 82.49,44.45 84.14,42.8 84.14,33.91 84.9,33.15 84.9,26.67 84.26,26.03 83.38,26.03 82.11,24.76 79.69,24.76 78.42,26.03 77.03,26.03 76.52,25.53 74.74,25.53 74.23,26.03 70.04,26.03 69.02,25.02 60.77,25.02 60.52,25.27 60.52,26.03 60.08,26.47 56.26,26.47 P3.2
  BOTTOM w0.203: P3.2 56.21,24.64 60.26,24.64 61.66,26.03 v2(61.66,27.81) 61.66,30.1 v1(61.02,30.73)
UART_RX: length 17.1
  TOP w0.203: v1(49.59,29.72) D1.A 48.53,28.7 R25.2 ; U6.31 v1(56.1,33.02)
  BOTTOM w0.203: v2(48.76,29.77) 49.54,29.77 v1(49.59,29.72) 49.59,29.18 49.82,28.96 50.58,28.96 51.19,29.57 51.75,29.57 52.03,29.84 52.39,29.84 53.43,30.89 53.43,32.41 54.93,33.91 56.07,33.91 56.32,33.66 56.32,33.24 v1(56.1,33.02)
UART_RX1: length 5.1
  TOP w0.203: P4.1 45.58,26.42 47.51,26.42 48.45,27.36 R25.1
UART_TX: length 20.2
  TOP w0.203: U6.30 v1(56.9,33.02) ; P4.2 47.28,25.5 48.32,26.54 49.97,26.54 50.23,26.8 50.23,29.59 v1(50.36,29.72)
  BOTTOM w0.203: v1(56.9,33.02) 56.71,33.22 56.71,33.91 56.32,34.29 54.7,34.29 53.02,32.61 53.02,31.19 52.18,30.35 51.88,30.35 51.62,30.1 50.73,30.1 v1(50.36,29.72)
UPU_RES: length 85
  TOP w0.203: v1(50.76,27.05) 50.76,26.77 51.12,26.42 54.17,26.42 54.42,26.16 54.42,25.02 54.8,24.64 58.44,24.64 P3.4 60.21,24.64 69.41,24.64 70.29,25.53 74.1,25.53 74.61,25.02 76.9,25.02 77.41,25.53 78.17,25.53 79.31,24.38 82.36,24.38 83.5,25.53 84.52,25.53 85.28,26.29 85.28,33.53 84.52,34.29 84.52,43.18 82.87,44.83 82.87,49.28 81.39,50.75 80.92,50.75 80.37,51.31 P5.4 ; U6.1 53.4,34.55 52.08,35.86 C31.2 52.08,36.2 51.7,36.58 50.48,36.58 50.1,36.2 v1(50.1,35.18)
  BOTTOM w0.203: v1(50.1,35.18) 49.47,34.54 47.94,34.54 47.69,34.29 47.69,28.8 48.55,27.94 v2(48.96,27.94) 49.87,27.94 v1(50.76,27.05)
VERTICAL_SYNC: length 12.8
  TOP w0.203: v1(55.3,33.02) U6.32 55.3,36.98 54.56,37.72 R24.2 53.23,38.1 53.4,38.28 53.4,38.99 54.36,39.95 P1.10
  BOTTOM w0.203: U7.3 56.46,31.87 55.69,32.64 55.68,32.64 v1(55.3,33.02) 55.05,33.02 v2(54.55,32.51)
VS: length 4.5
  BOTTOM w0.305: v2(57.8,29.72) 57.54,29.97 R26.1
  BOTTOM w0.33: C32.1 56.02,31.37 U7.2
  BOTTOM w0.559: C32.1 R26.1
N16006904: length 5.2
  TOP w0.203: TP10.1 63.44,26.03 63.44,29.46 63.15,29.75 U6.18
N16006928: length 1.7
  TOP w0.203: TP11.1 63.39,32.13 63.37,32.15 U6.21
N16007072: length 2.4
  TOP w0.203: U6.15 v1(60.1,28.83)
  BOTTOM w0.203: v1(60.1,28.83) 60.13,28.86 60.13,29.36 TP12.1
N16007076: length 2.3
  TOP w0.203: U6.14 v1(59.3,28.83)
  BOTTOM w0.203: TP13.1 59.3,29.58 v1(59.3,28.83)
N16007080: length 3.2
  TOP w0.203: U6.13 v1(58.5,28.81)
  BOTTOM w0.203: TP14.1 59.5,27.69 58.5,28.68 v1(58.5,28.81)
N16007084: length 2.8
  TOP w0.203: U6.12 v1(57.7,28.83)
  BOTTOM w0.203: TP15.1 57.7,28.59 v1(57.7,28.83)
N16007088: length 2.6
  TOP w0.203: U6.11 v1(56.9,28.83)
  BOTTOM w0.203: TP16.1 56.9,28.1 v1(56.9,28.83)
N16007096: length 2.9
  TOP w0.203: U6.10 v1(56.1,28.83)
  BOTTOM w0.203: v1(56.1,28.83) 56.1,27.25 TP17.1
N16007100: length 2.3
  TOP w0.203: U6.9 v1(55.3,28.83)
  BOTTOM w0.203: TP18.1 55.3,28.19 v1(55.3,28.83)
N16007406: length 3.7
  TOP w0.203: U6.17 62.03,28.95 61.4,28.32 TP21.1
N16007454: length 2.7
  TOP w0.203: U6.8 53.4,28.95 53.15,28.7 53.15,27.89 TP19.1
N16007512: length 2.4
  TOP w0.203: TP20.1 52.82,28.88 52.82,29.44 53.13,29.75 U6.7
N16007570: length 3.9
  TOP w0.203: U6.25 v1(60.9,33.06)
  BOTTOM w0.203: v1(60.9,33.06) 61.28,33.44 61.28,33.91 TP22.1
N16007642: length 3.9
  TOP w0.203: U6.27 v1(59.3,33.04)
  BOTTOM w0.203: TP23.1 v1(59.3,33.04)
N16007646: length 4
  TOP w0.203: U6.28 v1(58.5,33.03)
  BOTTOM w0.203: TP24.1 58.5,33.83 v1(58.5,33.03)
N16007650: length 4.1
  TOP w0.203: U6.29 v1(57.7,33.03)
  BOTTOM w0.203: v1(57.7,33.03) 57.7,33.62 TP25.1

## Copper pours and planes (outline as drawn; the poured copper is in the pictures)
2V8 on TOP (solid shape): 46.8,41.91 46.8,39.75 46.93,39.62 49.21,39.62 49.59,39.24 49.59,34.92 49.34,34.67 48.07,34.67 47.56,34.16 47.56,33.15 47.18,32.77 44.01,32.77 43.75,33.02 43.75,36.2 44.89,37.34 44.89,41.91 45.15,42.16 46.55,42.16
2V8 on BOTTOM (solid shape): 49.47,39.75 49.47,35.43 48.96,34.92 47.94,34.92 47.43,34.42 47.43,32.77 47.31,32.64 45.15,32.64 44.89,32.89 44.89,41.91 45.15,42.16 47.05,42.16
2V8 on BOTTOM (solid shape): 68.9,46.1 68.9,41.78 68.52,41.4 67.25,41.4 66.74,40.89 62.67,40.89 62.55,41.02 62.55,45.59 63.11,46.15 68.85,46.15
2V8 on VCC (solid shape): 68.77,35.94 65.09,32.26 54.04,32.26 53.66,31.88 53.66,30.86 52.51,29.72 52.13,29.72 51.24,28.83 49.21,28.83 47.69,30.35 47.69,31.62 47.05,32.26 43.5,32.26 43.5,40.92 46.52,43.94 62.14,43.94 62.93,44.73 62.93,47.24 68.77,47.24
2V8_HMD on TOP (solid shape): 60.9,41.66 60.9,40.89 60.64,40.64 60.01,40.64 59.37,40 58.36,40 58.23,40.13 58.23,41.25 58.31,41.33 59.17,41.33 59.63,41.78 60.77,41.78
2V8_HMD on BOTTOM (solid shape): 62.29,42.04 62.29,40.51 62.04,40.26 59.37,40.26 59.25,40.39 59.25,41.27 59.63,41.66 59.63,42.16 59.75,42.29 62.04,42.29
2V8IN on TOP (solid shape): 71.62,46.81 71.62,45.01 71.51,44.91 71.51,44.15 71.44,44.07 69.48,44.07 69.41,44.15 69.41,45.92 69.3,46.02 69.3,46.89 69.41,46.99 71.44,46.99
2V8IN on TOP (solid shape): 80.45,47.62 80.45,44.32 80.2,44.07 78.8,44.07 76.9,45.97 75.37,45.97 75.22,45.82 75.22,44.17 75.12,44.07 73.95,44.07 73.85,44.17 73.85,44.7 73.8,44.75 73.8,46.81 73.98,46.99 73.98,47.75 74.36,48.13 79.95,48.13
2V8IN on BOTTOM (solid shape): 81.6,50.29 81.6,43.18 80.96,42.55 79.69,42.55 78.17,44.07 73.95,44.07 73.85,44.17 73.85,44.7 73.8,44.75 73.8,45.39 73.72,45.47 71.56,45.47 71.44,45.34 71.44,44.07 71.31,43.94 69.66,43.94 69.41,44.2 69.41,46.86 69.53,46.99 73.85,46.99 74.1,47.24 74.1,50.29 74.36,50.55 81.34,50.55
2V8IN on VCC (solid shape): 83.44,55.85 81.35,54.97 83.44,54.09 83.44,47.65 83.48,47.55 83.53,47.46 83.58,47.4 83.63,47.35 83.72,47.29 83.82,47.26 83.86,47.24 84.95,47.24 84.95,39.12 69.28,39.12 69.28,47.24 73.1,47.24 73.18,47.27 73.25,47.31 73.32,47.36 73.38,47.42 73.42,47.49 73.48,47.62 73.48,54.09 75.58,54.97 73.48,55.84 73.48,57.25 83.44,57.25
AGND on TOP (solid shape): 47.56,31.17 47.56,27.15 47.33,26.92 44.08,26.92 43.88,27.13 43.88,30.58 44.69,31.39 47.33,31.39
AGND on TOP (solid shape): 72.94,32.21 72.94,29.57 72.33,28.96 66.84,28.96 66.43,29.36 66.43,32.61 66.84,33.02 72.12,33.02
AGND on TOP (solid shape): 81.98,57.53 81.98,57.02 81.85,56.9 75.12,56.9 74.99,57.02 74.99,57.53 75.12,57.66 81.85,57.66
AGND on TOP (solid shape): 20.38,45.21 20.38,41.78 20.26,41.66 19.11,41.66 18.86,41.91 18.86,45.21 18.99,45.34 20.26,45.34
AGND on TOP (solid shape): 42.99,36.58 42.99,34.92 42.74,34.67 37.91,34.67 37.66,34.92 37.66,36.58 37.91,36.83 42.74,36.83
AGND on TOP (solid shape): 43.37,45.21 43.37,42.67 43.12,42.42 38.29,42.42 38.04,42.67 38.04,45.21 38.29,45.47 43.12,45.47
AGND on TOP (solid shape): 81.6,32.77 81.6,28.8 81.34,28.55 77.81,28.55 77.41,28.96 77.41,32.89 77.66,33.15 81.22,33.15
AGND on TOP (solid shape): 73.62,41.68 73.47,41.53 71.95,41.53 71.79,41.68 71.79,43.84 71.82,43.87 73.62,43.87
AGND on TOP (solid shape): 30.8,46.74 30.8,45.34 30.54,45.09 29.1,45.09 28.38,44.37 27.67,44.37 27.24,43.94 26.1,43.94 25.84,44.2 25.84,46.74 26.1,46.99 30.54,46.99
AGND on TOP (solid shape): 69.15,46.86 69.15,46.1 69.02,45.97 68.64,45.97 68.41,45.75 68.41,45.24 68.26,45.09 66.99,45.09 66.87,45.21 66.87,46.86 66.99,46.99 69.02,46.99
AGND on TOP (solid shape): 83.93,50.42 83.93,47.9 84.09,47.75 85.28,47.75 85.41,47.62 85.41,34.67 85.28,34.54 84.9,34.54 84.77,34.67 84.77,47.02 84.65,47.14 83.6,47.14 83.25,47.5 83.25,50.42 83.38,50.55 83.81,50.55
AGND on TOP (solid shape): 73.62,46.84 73.62,44.73 73.7,44.65 73.7,44.17 73.6,44.07 71.82,44.07 71.69,44.2 71.69,44.88 71.79,44.98 71.79,46.84 71.95,46.99 73.47,46.99
AGND on TOP (solid shape): 80.33,54.1 80.33,52.96 80.2,52.83 79.95,52.83 79.82,52.7 79.82,50.93 79.69,50.8 78.55,50.8 78.42,50.93 78.42,53.21 78.55,53.34 78.55,54.1 78.68,54.23 80.2,54.23
AGND on TOP (solid shape): 24.83,39.5 24.83,38.23 24.7,38.1 23.69,38.1 23.43,37.85 23.43,37.34 23.3,37.21 23.05,37.21 22.42,36.58 22.42,34.67 22.29,34.54 18.86,34.54 18.73,34.67 18.73,37.72 18.99,37.97 20.89,37.97 21.65,38.73 23.18,38.73 23.3,38.86 23.3,39.5 23.43,39.62 24.7,39.62
AGND on TOP (solid shape): 66.36,42.43 66.36,39.8 67.86,38.3 67.86,35.66 69.08,34.44 69.08,33.83 68.67,33.43 66.03,33.43 64.2,35.26 61.76,35.26 61.35,35.66 61.35,37.11 61.25,37.21 61.25,38.91 62.06,38.91 62.06,36.98 62.37,36.68 64,36.68 65.21,37.9 65.21,38.51 65.01,38.71 64.99,38.71 64.68,39.01 62.17,39.01 62.06,38.91 61.25,38.91 61.25,39.22 62.37,40.34 63.39,40.34 63.59,40.54 63.59,42.37 63.79,42.57 66.21,42.57
AGND on TOP (solid shape): 73.72,50.42 73.72,47.4 73.47,47.14 18.58,47.14 18.58,34.39 43.09,34.39 43.6,33.88 43.6,24.38 78.68,24.38 79.06,24 82.74,24 83.12,24.38 84.77,24.38 84.9,24.51 84.9,25.02 85.03,25.15 85.28,25.15 85.41,25.02 85.41,23.88 85.31,23.77 43.04,23.77 43,23.79 42.99,23.83 42.99,33.63 42.84,33.78 18.02,33.78 17.99,33.8 17.97,33.83 17.97,47.7 17.99,47.74 18.02,47.75 72.83,47.75 72.99,47.9 72.99,50.44 73.09,50.55 73.6,50.55
AGND on BOTTOM (solid shape): 69.15,46.86 69.15,46.48 69.02,46.35 66.23,46.35 66.1,46.48 66.1,46.86 66.23,46.99 69.02,46.99
AGND on BOTTOM (solid shape): 83.88,57.53 83.88,57.02 83.76,56.9 73.22,56.9 73.09,57.02 73.09,57.53 73.22,57.66 83.76,57.66
AGND on BOTTOM (solid shape): 79.82,56.64 79.82,54.74 79.57,54.48 79.31,54.48 78.04,53.21 75.63,53.21 75.5,53.34 75.5,56.64 75.63,56.77 79.69,56.77
AGND on BOTTOM (solid shape): 73.6,45.21 73.6,44.75 73.7,44.65 73.7,44.17 73.55,44.02 71.79,44.02 71.67,44.15 71.67,45.29 71.72,45.34 73.47,45.34
AGND on BOTTOM (solid shape): 20.38,45.21 20.38,37.08 20.64,36.83 22.03,36.83 22.42,36.45 22.42,34.67 22.29,34.54 18.86,34.54 18.73,34.67 18.73,45.21 18.86,45.34 20.26,45.34
AGND on BOTTOM (solid shape): 71.89,33.45 71.89,27.1 69.48,24.69 66.84,24.69 66.64,24.89 66.64,25.5 66.84,25.7 68.26,25.7 68.69,26.14 68.69,33.45 68.87,33.63 71.72,33.63
AGND on BOTTOM (solid shape): 60.77,44.32 62.04,44.32 62.29,44.07 62.29,42.8 62.04,42.55 59.5,42.55 59.37,42.42 59.37,41.78 59.12,41.53 55.82,41.53 55.69,41.66 55.69,45.59 56.07,45.97 59.12,45.97
AGND on BOTTOM (solid shape): 81.67,33.32 81.67,27.23 81.5,27.05 80.71,27.05 80.45,26.8 80.45,25.78 79.95,25.27 79.95,24.76 79.82,24.64 76.52,24.64 76.39,24.76 76.39,25.5 76.59,25.7 78.05,25.7 78.47,26.13 78.47,33.32 78.68,33.53 81.47,33.53
AGND on BOTTOM (solid shape): 23.3,43.31 23.3,41.15 23.56,40.89 24.45,40.89 25.08,41.53 28.64,41.53 28.77,41.4 28.77,38.99 28.64,38.86 25.72,38.86 25.08,38.23 24.45,38.23 23.69,37.46 20.89,37.46 20.64,37.72 20.64,43.31 20.89,43.56 23.05,43.56
AGND on BOTTOM (solid shape): 73.72,53.59 73.72,47.5 73.37,47.14 18.58,47.14 18.58,34.39 43.09,34.39 43.6,33.88 43.6,24.38 84.77,24.38 84.9,24.51 84.9,28.07 85.15,28.32 85.15,34.67 84.77,35.05 84.77,47.02 84.65,47.14 83.6,47.14 83.25,47.5 83.25,53.59 83.38,53.72 83.76,53.72 83.93,53.54 83.93,47.9 84.09,47.75 85.28,47.75 85.41,47.62 85.41,23.9 85.28,23.77 43.04,23.77 43,23.79 42.99,23.83 42.99,33.63 42.84,33.78 18.02,33.78 17.99,33.8 17.97,33.83 17.97,47.7 17.99,47.74 18.02,47.75 72.83,47.75 72.99,47.9 72.99,53.62 73.09,53.72 73.6,53.72
AGND on GND (solid shape): outline of 343 points within 17.97,23.78 85.46,57.75
GND_IN on TOP (solid shape): 56.96,44.07 56.96,42.55 57.59,41.91 57.59,41.66 57.47,41.53 54.23,41.53 54.01,41.31 54.01,40 53.89,39.88 51.82,39.88 51.71,39.98 51.71,43.96 51.94,44.2 56.83,44.2
GND_IN on BOTTOM (solid shape): 55.44,44.07 55.44,41.53 55.18,41.27 54.29,41.27 53.66,40.64 53.4,40.64 52.77,41.27 52.01,41.27 51.75,41.53 51.75,44.07 52.01,44.32 55.18,44.32
VCC_5V on TOP (solid shape): 48.83,46.86 48.83,45.21 48.7,45.09 45.15,45.09 45.02,45.21 45.02,46.86 45.15,46.99 48.7,46.99
VCC_5V on TOP (solid shape): 25.21,46.74 25.21,44.2 24.96,43.94 24.45,43.94 24.19,44.2 23.43,44.2 23.18,43.94 23.18,41.78 23.43,41.53 23.43,40 23.3,39.88 23.18,39.88 23.05,39.75 23.05,39.12 22.9,38.96 21.63,38.96 20.89,38.23 18.99,38.23 18.86,38.35 18.86,40.26 18.99,40.39 19.62,40.39 19.75,40.51 19.75,41.27 19.88,41.4 20.38,41.4 20.64,41.66 20.64,46.74 20.89,46.99 24.96,46.99
VCC_5V on BOTTOM (solid shape): 27.46,46.99 27.55,46.94 27.55,46.84 27.7,46.2 28.35,46.24 28.38,46.25 28.77,46.1 29.15,46.25 29.53,46.1 29.91,46.25 29.94,46.24 30.6,46.2 30.74,46.84 30.74,46.94 30.83,46.99 55.31,46.99 55.44,46.86 55.44,44.7 55.18,44.45 46.16,44.45 45.78,44.07 24.19,44.07 24.07,44.2 23.56,44.2 23.43,44.07 21.27,44.07 21.02,44.32 21.02,46.61 21.4,46.99
VCC_5V on VCC (solid shape): 62.42,44.94 61.93,44.45 46.31,44.45 42.99,41.13 42.99,34.29 18.48,34.29 18.48,47.24 62.42,47.24
VCC_5VIN on TOP (solid shape): 51.5,44.14 51.5,39.95 51.43,39.88 48.58,39.88 48.32,40.13 48.32,44.07 48.53,44.27 51.37,44.27
VCC_5VIN on BOTTOM (solid shape): 51.5,44.2 51.5,41.53 51.24,41.27 48.7,41.27 48.45,41.53 48.45,43.81 48.58,43.94 50.36,43.94 50.74,44.32 51.37,44.32
3D3 on TOP (solid shape): 76.95,52.63 76.95,50.85 76.82,50.72 75.55,50.72 75.43,50.85 75.43,52.63 75.55,52.76 76.82,52.76
3D3 on TOP (solid shape): 83.88,40.64 83.88,36.7 83.63,36.45 81.85,36.45 81.6,36.7 81.6,40.77 81.72,40.89 83.63,40.89
3D3 on VCC (solid shape): 84.95,38.61 84.95,24.28 43.5,24.28 43.5,31.75 46.8,31.75 47.18,31.37 47.18,30.1 48.96,28.32 51.5,28.32 52.39,29.21 52.77,29.21 54.17,30.61 54.17,31.62 54.29,31.75 65.32,31.75 69.28,35.7 69.28,38.61 80.2,38.61 80.25,38.61
DD_OUT on TOP (solid shape): 44.64,41.91 44.64,37.46 44.26,37.08 35.24,37.08 34.99,37.34 34.99,41.91 35.24,42.16 44.39,42.16
DD_SW on TOP (solid shape): 31.81,42.29 31.81,38.35 31.69,38.23 26.33,38.23 26.1,38.46 25.18,38.46 25.08,38.56 25.08,39.62 25.21,39.75 25.21,40.39 25.59,40.77 25.59,41.27 25.84,41.53 26.1,41.53 26.23,41.66 26.23,42.55 26.48,42.8 31.31,42.8
LDO_INA on TOP (solid shape): 60.95,39.65 60.95,39.01 60.92,38.99 60.29,38.99 60.13,38.84 60.13,38.05 60.21,37.97 60.92,37.97 60.95,37.95 60.95,37.08 60.82,36.96 58.48,36.96 58.36,37.08 58.36,38.99 58.48,39.12 59.68,39.12 60.29,39.73 60.87,39.73

## Text on the board
Ref Des/Silkscreen Bottom: P/N:00.Z6306G001 | Rev:A | e1
Ref Des/Silkscreen Top: MP | A | IR_BOARD | OSVR
DXF_0324_BOT: H=1.3MM
User.5: ADD
User.6: 5 | 20 | 3 | 4 | 2 | 32 | 1 | 25 | 24 | 17 | 13 | 9 | 8 | 39 | 40
User.8: FIGURE | SIZE | 12.0 | 32.0 | 67.0 | DRILL CHART: TOP to BOTTOM | ALL UNITS ARE IN MILS | PLATED | NON-PLATED | QTY | 318 | 8 | 2
